# EAGLE board leonardo (EAGLE 7.5.0)
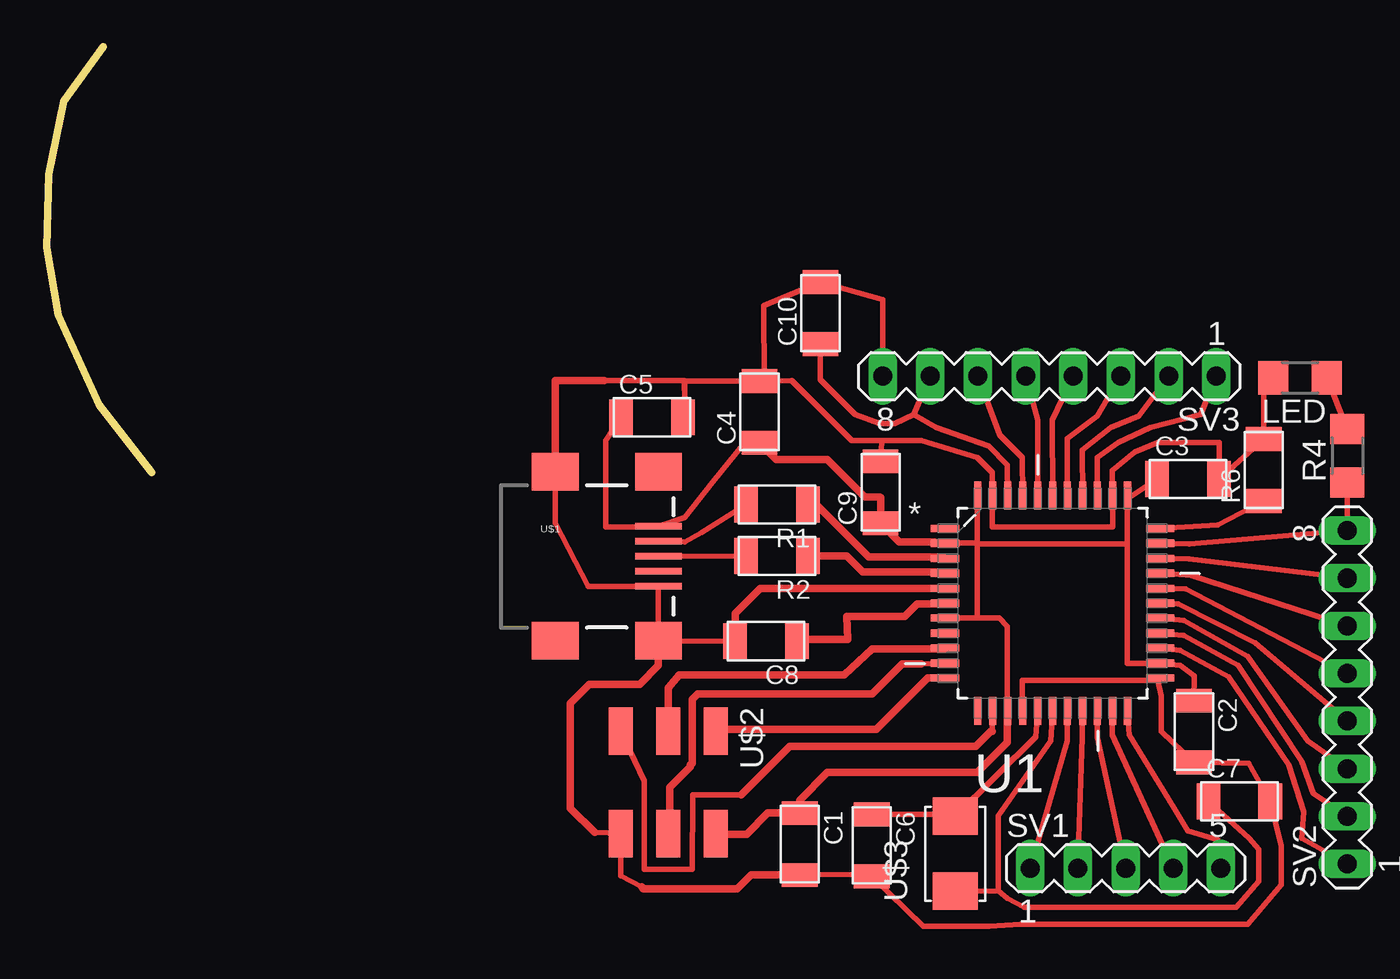
[diagram p0: board, top side]

Size 5.6 x 22.7 mm. Coordinates in mm from the lower left corner, seen from the top.
Outline: 5.6,0 2.8,3.6 0.6,8.4 0,12 0.1,15.9 0.9,19.8 3,22.7
Copper layers (1*16): Top 0.035mm / dielectric 1.5mm / Bottom 0.035mm
Design rules "default *": minimum track width 10mil, minimum drill 24mil, track to track 0.3mm, track to pad 0.3mm, pad to pad 0.3mm, via to via 0.3mm, smd to smd 0.3mm, copper to edge 40mil, drill to drill 0.4mm, minimum pad ring 10mil, minimum via ring 8mil, stop-mask expansion 4mil, vias tented up to drill 0mil, thermal gap 10mil

## Footprints (pad centres in the part's own frame; a part is rotated, then mirrored left to right if it is on the bottom)
C1206FAB = smd 1.27 x 1.905: 1 -1.651,0; 2 1.651,0
1206 = smd 1.6 x 1.803: 1 -1.422,0; 2 1.422,0
R1206FAB = smd 1.27 x 1.905: 1 -1.651,0; 2 1.651,0
MA05-1 = drill 1.016 long: 1 -5.08,0; 2 -2.54,0; 3 0,0; 4 2.54,0; 5 5.08,0
MA08-1 = drill 1.016 long: 1 -8.89,0; 2 -6.35,0; 3 -3.81,0; 4 -1.27,0; 5 1.27,0; 6 3.81,0; 7 6.35,0; 8 8.89,0
QFP80P1200X1200X120-44N = smd 1.5 x 0.38: 1 -5.74,3.988; 2 -5.74,3.2; 3 -5.74,2.388; 4 -5.74,1.6; 5 -5.74,0.787; 6 -5.74,0; 7 -5.74,-0.787; 8 -5.74,-1.6; 9 -5.74,-2.388; 10 -5.74,-3.2; 11 -5.74,-3.988; 23 5.74,-3.988; 24 5.74,-3.2; 25 5.74,-2.388; 26 5.74,-1.6; 27 5.74,-0.787; 28 5.74,0; 29 5.74,0.787; 30 5.74,1.6; 31 5.74,2.388; 32 5.74,3.2; 33 5.74,3.988 | smd 0.38 x 1.5: 12 -3.988,-5.74; 13 -3.2,-5.74; 14 -2.388,-5.74; 15 -1.6,-5.74; 16 -0.787,-5.74; 17 0,-5.74; 18 0.787,-5.74; 19 1.6,-5.74; 20 2.388,-5.74; 21 3.2,-5.74; 22 3.988,-5.74; 34 3.988,5.74; 35 3.2,5.74; 36 2.388,5.74; 37 1.6,5.74; 38 0.787,5.74; 39 0,5.74; 40 -0.787,5.74; 41 -1.6,5.74; 42 -2.388,5.74; 43 -3.2,5.74; 44 -3.988,5.74
USB_MINIB = smd 2.5 x 0.35: D+ 3.77,0; D- 3.77,0.8; GND 3.77,-1.6; ID 3.77,-0.8; VBUS 3.77,1.6 | smd 2.5 x 2: SHIELD@1 -1.73,-4.5; SHIELD@2 -1.73,4.5; SHIELD@3 3.77,4.5; SHIELD@4 3.77,-4.5
2X03SMD = smd 2.54 x 1.27: 1 -2.54,2.54; 2 2.92,2.54; 3 -2.54,0; 4 2.92,0; 5 -2.54,-2.54; 6 2.92,-2.54
2-SMD-5X3MM = smd 2 x 2.4: P$1 -2,0; P$2 2,0

## Placement (x,y rotation side)
C1  0.1uF  [C1206FAB]  40.13,-19.81 270 top  (outside the outline)
C2  0.1uF  [C1206FAB]  61.14,-13.81 270 top  (outside the outline)
C3  0.1uF  [C1206FAB]  60.83,-0.35 0 top  (outside the outline)
C4  0.1uF  [C1206FAB]  37.98,3.23 90 top  (outside the outline)
C5  0.1uF  [C1206FAB]  32.25,2.94 0 top  (outside the outline)
C6  18pF  [C1206FAB]  43.97,-19.88 270 top  (outside the outline)
C7  18pF  [C1206FAB]  63.57,-17.54 0 top  (outside the outline)
C8  0.1uF  [C1206FAB]  38.33,-9 180 top  (outside the outline)
C9  0.1uF  [C1206FAB]  44.44,-1.05 90 top  (outside the outline)
C10  0.1uF  [C1206FAB]  41.23,8.5 90 top  (outside the outline)
LED  [1206]  66.8,5.05 180 top  (outside the outline)
R1  22ohm  [R1206FAB]  38.92,-1.7 180 top  (outside the outline)
R2  22ohm  [R1206FAB]  38.92,-4.45 180 top  (outside the outline)
R4  499  [1206]  69.32,0.9 90 top  (outside the outline)
R6  680  [R1206FAB]  64.87,0.14 90 top  (outside the outline)
SV1  [MA05-1]  57.5,-21.1 0 top  (outside the outline)
SV2  [MA08-1]  69.32,-11.98 90 top  (outside the outline)
SV3  [MA08-1]  53.44,5.14 180 top  (outside the outline)
U1  ATMEGA32U4-AU  [QFP80P1200X1200X120-44N]  53.61,-6.97 0 top  (outside the outline)
U$1  USB_MINIB  [USB_MINIB]  28.83,-4.47 0 top  (outside the outline)
U$2  AVRISPSMD  [2X03SMD]  33.12,-16.34 270 top  (outside the outline)
U$3  CRYSTAL  [2-SMD-5X3MM]  48.42,-20.33 90 top  (outside the outline)

## Library data of the parts
C1-C10 R1 R2 R6 U$1-U$3 = fab
LED R4 = ng
SV1 = con-lstb; OC_FARNELL: unknown; OC_NEWARK: unknown
SV2 SV3 = con-lstb
U1 = Atmel_By_element14_Batch_1; MPN: ATMEGA32U4-AU; OC_FARNELL: 1748525; OC_NEWARK: 26R5633; PACKAGE: TQFP-44; SUPPLIER: Atmel

## Nets
A0: SV3.1 U1.36
A1: SV3.2 U1.37
A2: SV3.3 U1.38
A3: SV3.4 U1.39
A4: SV3.5 U1.40
A5: SV3.6 U1.41
AREF: C10.1 SV3.7 U1.42
D0: SV1.3 U1.20
D1: SV1.4 U1.21
D2: SV1.2 U1.19
D3: SV1.1 U1.18
D4: SV2.1 U1.25
D5: SV2.7 U1.31
D6: SV2.3 U1.27
D7: U1.1
D8: SV2.4 U1.28
D9: SV2.5 U1.29
D10: SV2.6 U1.30
D11: U1.12
D12: SV2.2 U1.26
D13: R4.1 SV2.8 U1.32
D14: U1.8
D15: U1.9 U$2.3
D16: U1.10 U$2.4
D17: U1.11 U$2.1
D+: R2.1 U1.4
D-: R1.1 U1.3
GND: C1.2 C2.2 C3.2 C4.2 C5.2 C6.2 C7.2 C8.2 C9.2 C10.2 LED.2 R6.2 SV3.8 U1.5 U1.15 U1.23 U1.35 U1.43 U$1.GND U$1.SHIELD@2 U$1.SHIELD@4 U$2.6
N$1: R1.2 U$1.D-
N$2: R2.2 U$1.D+
N$3: LED.1 R4.2
N$35: R6.1 U1.33
RESET: U1.13 U$2.5
TXLED: SV1.5 U1.22
UCAP: C8.1 U1.6
VCC: C1.1 C2.1 C3.1 C4.1 C5.1 C9.1 U1.2 U1.7 U1.14 U1.24 U1.34 U1.44 U$1.VBUS U$2.2
XTAL1: C7.1 U1.17 U$3.P$1
XTAL2: C6.1 U1.16 U$3.P$2

## Tracks (layer width: path | path; a pad name or v marks a point on that pad's centre or on a via)
A0
  Top 0.305: U1.36 56,0.8 57.1,1.6 58.8,2.4 61.5,3.1 SV3.1
A1
  Top 0.305: U1.37 55.2,1.2 56.7,2.4 58.2,3 SV3.2
A2
  Top 0.305: U1.38 54.4,1.8 56,3 SV3.3
A3
  Top 0.305: U1.39 53.6,2.8 SV3.4
A4
  Top 0.305: U1.40 52.83,2.79 SV3.5
A5
  Top 0.305: U1.41 52,0.8 50.8,2 SV3.6
AREF
  Top 0.305: C10.1 41.23,4.97 43.1,3.1 44.4,2.6 45.2,2.6 46.2,3.1 | 46.2,3.1 SV3.7 | U1.42 51.2,0.4 50.2,1.4 47.4,2.4 46.2,3.1
D0
  Top 0.305: SV1.3 56,-14.1 U1.20
D1
  Top 0.305: SV1.4 56.8,-14 U1.21
D2
  Top 0.305: SV1.2 55.2,-14.1 U1.19
D3
  Top 0.305: SV1.1 54.4,-14.3 U1.18
D4
  Top 0.305: U1.25 60.4,-9.5 63,-10.9 66.2,-15.6 67,-18.1 66.9,-19.5 SV2.1
D5
  Top 0.305: U1.31 60.9,-4.6 SV2.7
D6
  Top 0.305: U1.27 60.6,-7.9 64,-9.8 67.2,-14.3 SV2.3
D8
  Top 0.305: U1.28 60.3,-7 64.4,-9.1 SV2.4
D9
  Top 0.305: U1.29 60.7,-6.2 SV2.5
D10
  Top 0.305: U1.30 61,-5.5 SV2.6
D12
  Top 0.305: U1.26 60.6,-8.7 63.5,-10.3 66.9,-15.4 67.5,-17.1 SV2.2
D13
  Top 0.305: U1.32 60.9,-3.8 SV2.8 R4.1
D15
  Top 0.406: U1.9 47.83,-9.4 44,-9.4 42.5,-10.8 33.7,-10.8 33.12,-11.48 U$2.3
D16
  Top 0.305: 46.6,-10.2 U1.10
  Top 0.406: U$2.4 33.2,-19.17 33.2,-16.8 34.3,-15.7 34.3,-15.6 34.4,-15.5 34.4,-12.1 34.7,-11.8 44,-11.8 45.6,-10.2 46.6,-10.2
D17
  Top 0.406: U$2.1 35.75,-13.7 44.2,-13.7 46.94,-10.96 U1.11
D+
  Top 0.406: U1.4 47.8,-5.3 43.5,-5.3 42.65,-4.45 R2.1
D-
  Top 0.406: U1.3 47.79,-4.5 43.8,-4.5 41,-1.7 R1.1
GND
  Top 0.305: SV3.8 44.56,9.24 C10.2 | 38.23,4.89 C4.2 39.7,4.9 42.9,1.7 44.5,1.7 | 38.23,4.89 38.2,8.9 C10.2 | 40.95,10.15 C10.2 | U1.15 52,-11.1 59.21,-11.1 | U1.23 59.21,-11.1 | 34,3.8 34,3.04 C5.2 | 44.5,1.7 46.6,1.7 49.6,0.8 50.4,0 U1.43 50.4,-2.9 56.8,-2.9 56.81,-2.89 U1.35 56.8,0.1 58,1.1 59.2,1.6 62.5,1.6 C3.2 R6.2 64.86,4.98 LED.2 | 59.21,-11.1 59.4,-11.9 59.4,-13.8 C2.2 64.08,-15.52 C7.2 65.8,-19.9 65.8,-22 64,-24.1 51.9,-24.1 50.2,-24.2 46.7,-24.2 C6.2 43.4,-21.44 C1.2 | 31.7,-22.1 30.6,-21.5 U$2.6 29.2,-19.2 | C8.2 U$1.SHIELD@4 U$1.GND 28.87,-6.07 27.1,-2.7 U$1.SHIELD@2 | C9.2 44.5,1.7 | 29.7,4.9 33.97,4.9 34,3.8 | 38.23,4.89 34.01,4.88 34,3.8
  Top 0.406: C8.2 36.68,-7.52 38.02,-6.18 U1.5 | 29.2,-19.2 27.9,-17.9 27.9,-12.3 28.9,-11.3 31.6,-11.3 32.6,-10.3 U$1.SHIELD@4 | 31.7,-22.1 31.8,-22.2 36.8,-22.2 37.53,-21.46 C1.2 | U$1.SHIELD@2 27.1,4.9 29.7,4.9
N$1
  Top 0.305: R1.2 34.9,-3.2 34,-3.7 U$1.D-
N$2
  Top 0.305: R2.2 U$1.D+
N$3
  Top 0.305: LED.1 R4.2
N$35
  Top 0.305: U1.33 62.4,-2.8 R6.1
RESET
  Top 0.305: U1.13 50.4,-13.8 | 37,-17.2 34.43,-17.18 34.41,-21.15 31.84,-21.15 31.84,-16.45 U$2.5
  Top 0.406: 37,-17.2 39.6,-14.6 49.5,-14.6 50.3,-13.8 50.4,-13.8
TXLED
  Top 0.305: SV1.5 62.4,-19.6 60.8,-19.1 60.1,-17.9 57.7,-14 U1.22
UCAP
  Top 0.406: C8.1 40.08,-8.9 42.7,-8.9 42.63,-7.67 45.73,-7.67 46.4,-7 47.84,-7 U1.6
VCC
  Top 0.305: C3.1 57.69,-1.32 U1.34 57.6,-3.8 | U1.14 51.2,-12.69 51.2,-8.2 50.76,-7.76 49.6,-7.76 | 49.6,-7.76 U1.7 | 57.6,-3.8 49.6,-3.8 | 49.6,-3.77 49.6,-1.23 U1.44 | 47.87,-3.8 U1.2 49.6,-3.77 | 57.6,-3.8 57.6,-10.17 U1.24 60.4,-10.3 61.17,-10.84 C2.1 | 49.6,-3.8 49.6,-7.76 | 49.6,-3.8 49.6,-3.77 | C5.1 29.8,1.7 29.8,-2.9 32.6,-2.9 U$1.VBUS 34,-2.4 35.5,-0.5 37.2,1.6 C4.1
  Top 0.406: C4.1 38.87,0.7 41.6,0.7 43.6,-1.3 44.4,-1.3 44.44,-1.34 C9.1 45.43,-3.7 47.3,-3.7 47.37,-3.77 U1.2 | U1.14 51.2,-12.73 51.2,-14.4 49.6,-16 41.6,-16 40.13,-17.47 C1.1 38.44,-18.16 37.3,-19.3 35.7,-19.3 U$2.2
XTAL1
  Top 0.305: C7.1 64.1,-19.5 64.6,-20.1 64.6,-21.8 63.4,-23.2 52.1,-23.2 51.2,-22.7 50.7,-22.3 | 50.7,-22.3 U$3.P$1 | 50.7,-22.3 50.7,-18.3 53.5,-14.3 U1.17
XTAL2
  Top 0.305: U1.16 52.7,-14.1 U$3.P$2 47.97,-18.23 C6.1

## Text on the board
200bmp: C:/Users/LuizHenrique/Desktop/FabAcademy/_Final Project/myBoards/Jalapino/JLPINO_03.bmp
208bmp: C:/Users/LuizHenrique/Desktop/FabAcademy/_Final Project/myBoards/Jalapino/JLPINO_03.bmp
210bmp: C:/Users/LuizHenrique/Desktop/FabAcademy/_Final Project/myBoards/Jalapino/JLPINO_03.bmp